# Altium PCB USB-HUB-H.pcbdoc (part 1 of 2)
Units mil, origin at the board's own origin, x right, y up, seen from the top; angles counter-clockwise.
Board outline 2972.16 x 4462.97 mil, 2 copper layers (Top Layer, Bottom Layer); 133 components, 134 nets, 513 pads, 306 vias.
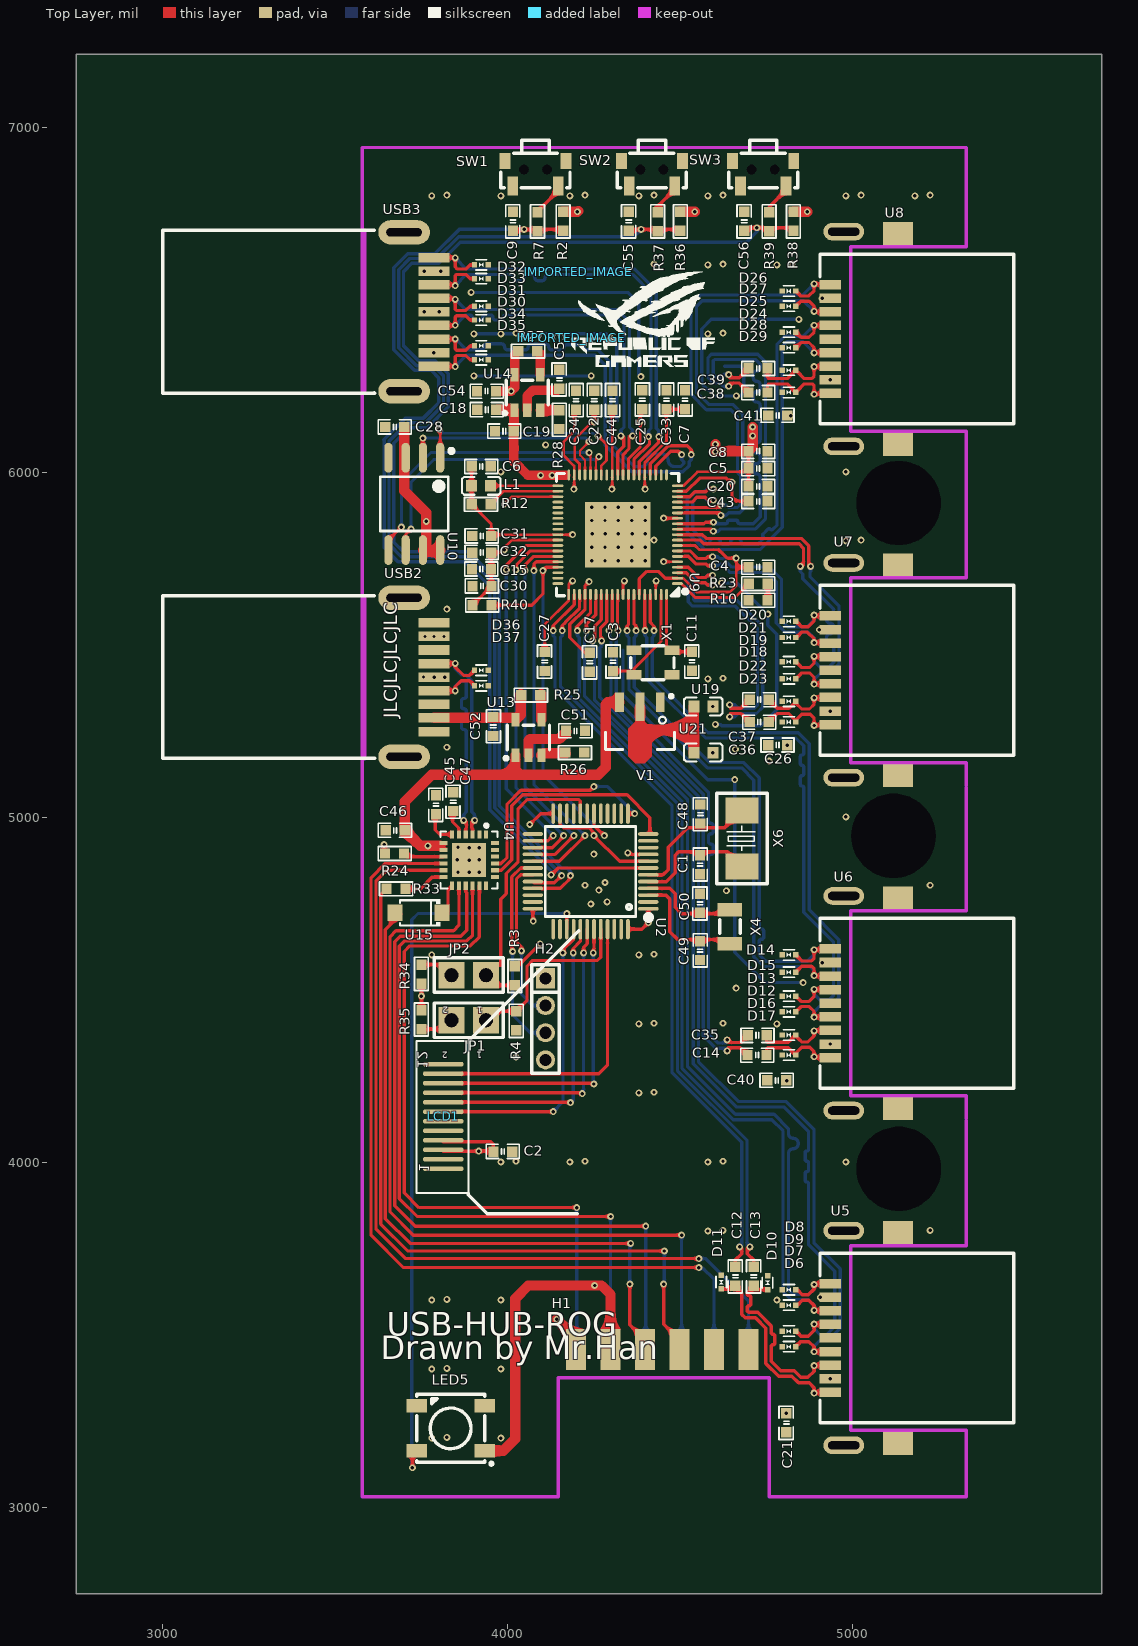
[diagram p0: Top Layer view]
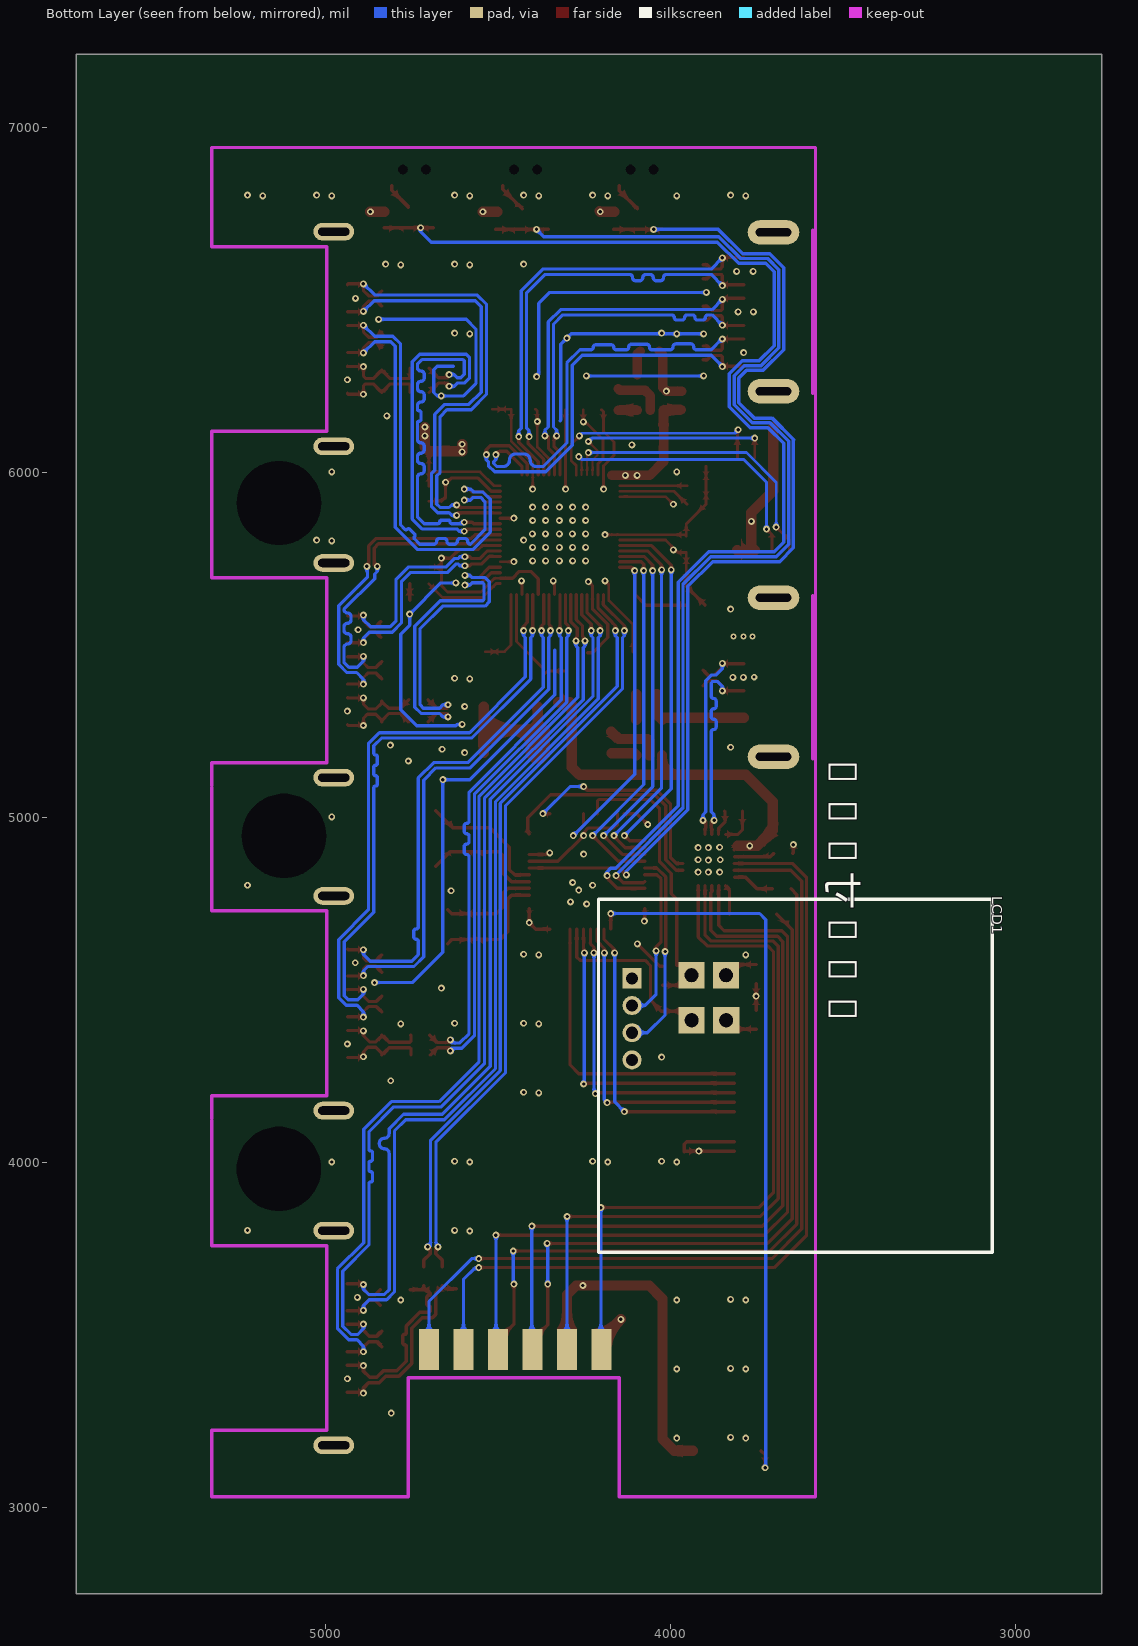
[diagram p1: Bottom Layer view, seen from below]

## Layer stack, top to bottom
Top Layer: signal copper (thickness not stored)
Dielectric: dielectric 12.6, FR-4, Dk 4.8
Bottom Layer: signal copper (thickness not stored)

## Board outline
5722.16,2750 2750,2750 2750,7212.97 5722.16,7212.97
cut-out: 5241.38,4947 ccw(c5119.33,4947) 4997.28,4947 ccw(c5119.33,4947)
cut-out: 5256.38,3982 ccw(c5134.33,3982) 5012.28,3982 ccw(c5134.33,3982)
cut-out: 5256.14,5912 ccw(c5134.09,5912) 5012.05,5912 ccw(c5134.09,5912)

## Components (designator, comment, footprint, x,y, rotation, side; value= is the part's Value field where it differs from the comment)
C1 "20p" C0603-S 4558.56,4836 r90 top
C2 "0.1u" C0603-S 4014.76,4032 r180 top
C3 "22pF" C0603-S 4306.17,5424.56 r90 top
C4 "4.7uF" C0603-S 4699.09,5726 r0 top
C5 "4.7uF" C0603-S 4699.09,6012 r0 top
C6 "4.7uF" C0603-S 3896.47,6018 r0 top
C7 "4.7uF" C0603-S 4515.09,6183.63 r90 top
C8 "4.7uF" C0603-S 4699.09,6062 r0 top
C9 "10u" C0603-S 4016.37,6755.8 r270 top
C11 "22pF" C0603-S 4535.09,5480.56 r270 top
C12 "0.1uF" C0603-S 4660.87,3698 r270 top
C13 "0.1uF" C0603-S 4714.09,3698 r270 top
C14 "0.1uF" C0603-S 4696.09,4311.87 r0 top
C15 "1uF" C0603-S 3952.47,5720 r180 top
C17 "0.1uF" C0603-S 4238.76,5478 r270 top
C18 "47uF/16V" C0603-S 3968.16,6182 r180 top
C19 "47uF/16V" C0603-S 4019.09,6119.5 r180 top
C20 "47uF/16V" C0603-S 4699.09,5960 r0 top
C21 "47uF/16V" C0603-S 4808.57,3274 r270 top
C22 "0.1uF" C0603-S 4251.91,6182 r90 top
C25 "0.1uF" C0603-S 4391.09,6183.63 r90 top
C26 "0.1uF" C0603-S 4811.09,5210 r180 top
C27 "0.1uF" C0603-S 4108.23,5480 r270 top
C28 "0.1uF" C0603-S 3701.64,6132 r180 top
C30 "0.1uF" C0603-S 3954.16,5671 r180 top
C31 "0.1uF" C0603-S 3953.51,5816 r180 top
C32 "0.1uF" C0603-S 3953.51,5768 r180 top
C33 "0.1uF" C0603-S 4461.09,6183.63 r90 top
C34 "0.1uF" C0603-S 4199.19,6182 r90 top
C35 "0.1uF" C0603-S 4697.09,4369.5 r0 top
C36 "0.1uF" C0603-S 4702.22,5277 r0 top
C37 "0.1uF" C0603-S 4702.22,5342 r0 top
C38 "0.1uF" C0603-S 4699.09,6232 r0 top
C39 "0.1uF" C0603-S 4699.09,6302 r0 top
C40 "0.1uF" C0603-S 4808.57,4238.46 r180 top
C41 "0.1uF" C0603-S 4811.09,6165.5 r180 top
C43 "0.1uF" C0603-S 4699.09,5916.5 r0 top
C44 "0.1uF" C0603-S 4304.62,6182 r90 top
C45 "CAP_0603" C0603-S 3793.09,5064.95 r270 top
C46 "CAP_0603" C0603-S 3702.24,4963 r180 top
C47 "CAP_0603" C0603-S 3843.17,5074 r270 top
C48 "20p" C0603-S 4559.56,5037.94 r270 top
C49 "20p" C0603-S 4558.56,4587.15 r90 top
C50 "20p" C0603-S 4558.56,4779.15 r270 top
C51 "CAP_0603" C0603-S 4225.18,5251.27 r180 top
C52 "CAP_0603" C0603-S 3959.43,5236.71 r90 top
C53 "CAP_0603" C0603-S 4150.75,6297.67 r270 top
C54 "CAP_0603" C0603-S 3912.16,6236 r0 top
C55 "10u" C0603-S 4352.09,6755.8 r270 top
C56 "10u" C0603-S 4686.53,6755.8 r270 top
D6 "ESD9B3.3ST5G" SOD-923_L0.8-W0.6-LS1.0-BI-1 4816.12,3467 r0 top
D7 "ESD9B3.3ST5G" SOD-923_L0.8-W0.6-LS1.0-BI-1 4816.12,3512 r0 top
D8 "ESD9B3.3ST5G" SOD-923_L0.8-W0.6-LS1.0-BI-1 4816.12,3631.76 r0 top
D9 "ESD9B3.3ST5G" SOD-923_L0.8-W0.6-LS1.0-BI-1 4816.12,3587 r0 top
D10 "ESD9B3.3ST5G" SOD-923_L0.8-W0.6-LS1.0-BI-1 4754.09,3652 r270 top
D11 "ESD9B3.3ST5G" SOD-923_L0.8-W0.6-LS1.0-BI-1 4619.87,3654 r270 top
D12 "ESD9B3.3ST5G" SOD-923_L0.8-W0.6-LS1.0-BI-1 4816.12,4437 r0 top
D13 "ESD9B3.3ST5G" SOD-923_L0.8-W0.6-LS1.0-BI-1 4816.12,4482.69 r0 top
D14 "ESD9B3.3ST5G" SOD-923_L0.8-W0.6-LS1.0-BI-1 4816.12,4602 r0 top
D15 "ESD9B3.3ST5G" SOD-923_L0.8-W0.6-LS1.0-BI-1 4816.12,4552 r0 top
D16 "ESD9B3.3ST5G" SOD-923_L0.8-W0.6-LS1.0-BI-1 4816.12,4370 r0 top
D17 "ESD9B3.3ST5G" SOD-923_L0.8-W0.6-LS1.0-BI-1 4816.12,4312 r0 top
D18 "ESD9B3.3ST5G" SOD-923_L0.8-W0.6-LS1.0-BI-1 4816.12,5402 r0 top
D19 "ESD9B3.3ST5G" SOD-923_L0.8-W0.6-LS1.0-BI-1 4816.12,5452 r0 top
D20 "ESD9B3.3ST5G" SOD-923_L0.8-W0.6-LS1.0-BI-1 4816.12,5568.48 r0 top
D21 "ESD9B3.3ST5G" SOD-923_L0.8-W0.6-LS1.0-BI-1 4816.12,5522 r0 top
D22 "ESD9B3.3ST5G" SOD-923_L0.8-W0.6-LS1.0-BI-1 4816.12,5337 r0 top
D23 "ESD9B3.3ST5G" SOD-923_L0.8-W0.6-LS1.0-BI-1 4816.12,5277 r0 top
D24 "ESD9B3.3ST5G" SOD-923_L0.8-W0.6-LS1.0-BI-1 4816.12,6362 r0 top
D25 "ESD9B3.3ST5G" SOD-923_L0.8-W0.6-LS1.0-BI-1 4816.12,6407 r0 top
D26 "ESD9B3.3ST5G" SOD-923_L0.8-W0.6-LS1.0-BI-1 4816.12,6526.11 r0 top
D27 "ESD9B3.3ST5G" SOD-923_L0.8-W0.6-LS1.0-BI-1 4816.12,6482.31 r0 top
D28 "ESD9B3.3ST5G" SOD-923_L0.8-W0.6-LS1.0-BI-1 4816.12,6297 r0 top
D29 "ESD9B3.3ST5G" SOD-923_L0.8-W0.6-LS1.0-BI-1 4816.12,6232.11 r0 top
D30 "ESD9B3.3ST5G" SOD-923_L0.8-W0.6-LS1.0-BI-1 3924.47,6442 r180 top
D31 "ESD9B3.3ST5G" SOD-923_L0.8-W0.6-LS1.0-BI-1 3924.47,6482 r180 top
D32 "ESD9B3.3ST5G" SOD-923_L0.8-W0.6-LS1.0-BI-1 3924.47,6602 r180 top
D33 "ESD9B3.3ST5G" SOD-923_L0.8-W0.6-LS1.0-BI-1 3924.47,6562 r180 top
D34 "ESD9B3.3ST5G" SOD-923_L0.8-W0.6-LS1.0-BI-1 3924.47,6367 r180 top
D35 "ESD9B3.3ST5G" SOD-923_L0.8-W0.6-LS1.0-BI-1 3924.47,6327 r180 top
D36 "ESD9B3.3ST5G" SOD-923_L0.8-W0.6-LS1.0-BI-1 3924.47,5427 r180 top
D37 "ESD9B3.3ST5G" SOD-923_L0.8-W0.6-LS1.0-BI-1 3924.47,5382 r0 top
H1 "HDR-M_2.54_2x6" 2.54-2*12pin-SMD 4444.09,3458.54 r0 top
H2 "PZ200V-11-04P" HDR-TH_4P-P2.00-V-M 4110.76,4416.02 r270 top
IMPORTED_IMAGE "IMPORTED_IMAGE" IMPORTED_IMAGE 4205.09,6582 r0 top
IMPORTED_IMAGE "IMPORTED_IMAGE" IMPORTED_IMAGE 4185.09,6390 r0 top
JP1 "跳线" JUMPER2 3888.03,4412.79 r0 top
JP2 "跳线" JUMPER2 3888.26,4543.33 r0 top
L1 "10uH Idc&gt;500mA" L0603 3924.2,5962 r180 top
LCD1 "中景园1.3寸IPS屏" 中景园1.3寸IPS屏-原版 3637.09,4252 r270 bottom
LED5 "WS2812B-B/W" LED-SMD_4P-L5.0-W5.0-BL_TC5050RGB 3835.67,3230 r180 top
R2 "10k" R0603-S 4161.69,6700.8 r90 top
R3 "10k" R0603-S 4021.92,4514 r90 top
R4 "10k" R0603-S 4025.93,4384 r90 top
R7 "300R" R0603-S 4087.43,6754.8 r270 top
R10 "5.1K" R0603-S 4754.09,5630 r180 top
R12 "0Ω/DNP" R0603-S 3896.76,5908 r0 top
R23 "1K" R0603-S 4700.09,5678 r0 top
R24 "10K" R0603-S 3700.64,4896 r180 top
R25 "Res_0603" R0603-S 4095.43,5355 r180 top
R26 "Res_0603" R0603-S 4223.09,5188.51 r180 top
R27 "Res_0603" R0603-S 4087.09,6352 r180 top
R28 "Res_0603" R0603-S 4150.75,6126 r90 top
R33 "Res_0603" R0603-S 3704.77,4793.65 r180 top
R34 "10k" R0603-S 3751.09,4574 r270 top
R35 "10k" R0603-S 3751.09,4442 r270 top
R36 "10k" R0603-S 4501.59,6700.8 r90 top
R37 "300R" R0603-S 4435.6,6754.8 r270 top
R38 "10k" R0603-S 4829.3,6700.8 r90 top
R39 "300R" R0603-S 4758.64,6754.8 r270 top
R40 "10K" R0603-S 3954.16,5615.65 r180 top
SW1 "GT-TC018B-H0375-L1" SW-SMD_L4.7-W3.5-P3.35-EH 4081.56,6867 r0 top
SW2 "GT-TC018B-H0375-L1" SW-SMD_L4.7-W3.5-P3.35-EH 4419.09,6867 r0 top
SW3 "GT-TC018B-H0375-L1" SW-SMD_L4.7-W3.5-P3.35-EH 4741.43,6867 r0 top
U2 "STM32F103C6T6ATR" LQFP-48_L7.0-W7.0-P0.50-LS9.0-BL 4241.27,4844.15 r90 top
U4 "CH342F" VQFN-24_L4.0-W4.0-P0.50-TL-EP2.4 3889.31,4877 r270 top
U5 "A32-099A-111" USB-SMD_A32-099A-111 5034.09,3492 r90 top
U6 "A32-099A-111" USB-SMD_A32-099A-111 5034.09,4462 r90 top
U7 "A32-099A-111" USB-SMD_A32-099A-111 5034.09,5427 r90 top
U8 "A32-099A-111" USB-SMD_A32-099A-111 5034.09,6387 r90 top
U9 "VL813(A1)" "VL813 QFN-76 02" 4319.68,5820 r90 top
U10 "W25Q16JVSIQ" W25Q16 3805.42,6038 r180 top
U13 "MT9700" SOT-23-5_L3.0-W1.7-P0.95-LS2.8-BR 4061.22,5232 r270 top
U14 "MT9700" SOT-23-5_L3.0-W1.7-P0.95-LS2.8-BR 4057.91,6232 r270 top
U15 "BAV21W_C2903907" SOD-123_L2.7-W1.6-LS3.8-RD 3742.82,4724 r180 top
U19 "BLM18PG121SN1D" L0603 4568.16,5322 r0 top
U21 "BLM18PG121SN1D" L0603 4568.16,5188.14 r0 top
USB2 "U237-091N-4BLVS10-1" USB3.0-A-SMD_U237-091N-4BLVS10-1 3744.09,5407 r270 top
USB3 "U237-091N-4BLVS10-1" USB3.0-A-SMD_U237-091N-4BLVS10-1 3744.09,6465.71 r270 top
V1 "AMS1117" SOT89_N 4384.34,5257.43 r90 top
X1 "XTAL_3225_25M" SMD-4_3225-ACM3225 4422.09,5449.06 r180 top
X4 "Q13FC1350000400" FC-135R_L3.2-W1.5 4645.1,4684.15 r270 top
X6 "XC53G2-8.000-F12NJHP" CRYSTAL-SMD_L5.0-W3.2 4680.04,4939.47 r270 top

## Footprints (in the part's own frame and the unit in brackets; to place one, negate y for a bottom-side part, rotate by r counter-clockwise, add the part's x,y. Pads: shape width x height; smd on the part's side, far side on the other; paste and mask are expansions set on the pad)
2.54-2*12pin-SMD [mm]
  rect 1.5x3 smd: 1(-6.223,0) 3(-3.683,0) 5(-1.143,0) 7(1.397,0) 9(3.937,0) 11(6.477,0)
  rect 1.5x3 smd far side: 2(-6.223,0) 4(-3.683,0) 6(-1.143,0) 8(1.397,0) 10(3.937,0) 12(6.477,0)
C0603-S [mil]
  rect 30x30 smd: 1(0,0) 2(55,0)
  silkscreen extent -20,-21 76,20
CRYSTAL-SMD_L5.0-W3.2 [mm]
  rect 1.9x2.4 smd: 1(-2.05,0) 2(2.05,0)
  silkscreen extent -3.32,-1.85 3.33,1.85
FC-135R_L3.2-W1.5 [mm]
  rect 1x1.8 smd: 1(-1.25,0) 2(1.25,0)
  silkscreen extent -0.51,-0.76 0.51,0.76
HDR-TH_4P-P2.00-V-M [mm]
  rect 1.524x1.4 hole 0.9: 1(-3,0)
  round 1.4 hole 0.9: 2(-1,0) 3(1,0) 4(3,0)
  silkscreen extent -4,-1 4,1.02
IMPORTED_IMAGE [mil]
  silkscreen extent 0,-189 366,0
JUMPER2 [mil]
  rect 76x76 hole 39.4 slot 39.6 at 90 deg: 1(50,0) 2(-50,0)
  silkscreen extent -100,-50 100,50
L0603 [mm]
  rect 0.8x0.864 smd: 1(-0.7,0) 2(0.7,0)
  silkscreen extent -1.42,-0.65 1.41,0.67
LED-SMD_4P-L5.0-W5.0-BL_TC5050RGB [mm]
  rect 1.5x1 smd: 1(-2.5,1.65) 2(-2.5,-1.65) 3(2.5,-1.65) 4(2.5,1.65)
  silkscreen extent -3.1,-2.5 2.5,2.7
LQFP-48_L7.0-W7.0-P0.50-LS9.0-BL [mm]
  oval 0.27x1.5 smd: 1(-2.75,-4.25) 2(-2.25,-4.25) 3(-1.75,-4.25) 4(-1.25,-4.25) 5(-0.75,-4.25) 6(-0.25,-4.25) 7(0.25,-4.25) 8(0.75,-4.25) 9(1.25,-4.25) 10(1.75,-4.25) 11(2.25,-4.25) 12(2.75,-4.25) 25(2.75,4.25) 26(2.25,4.25) 27(1.75,4.25) 28(1.25,4.25) 29(0.75,4.25) 30(0.25,4.25) 31(-0.25,4.25) 32(-0.75,4.25) 33(-1.25,4.25) 34(-1.75,4.25) 35(-2.25,4.25) 36(-2.75,4.25)
  oval 1.5x0.27 smd: 13(4.25,-2.75) 14(4.25,-2.25) 15(4.25,-1.75) 16(4.25,-1.25) 17(4.25,-0.75) 18(4.25,-0.25) 19(4.25,0.25) 20(4.25,0.75) 21(4.25,1.25) 22(4.25,1.75) 23(4.25,2.25) 24(4.25,2.75) 37(-4.25,2.75) 38(-4.25,2.25) 39(-4.25,1.75) 40(-4.25,1.25) 41(-4.25,0.75) 42(-4.25,0.25) 43(-4.25,-0.25) 44(-4.25,-0.75) 45(-4.25,-1.25) 46(-4.25,-1.75) 47(-4.25,-2.25) 48(-4.25,-2.75)
  silkscreen extent -3.59,-4.46 3.3,3.34
R0603-S [mil]
  rect 30x30 smd: 1(0,0) 2(55,0)
  silkscreen extent -21,-20 75,20
SMD-4_3225-ACM3225 [mm]
  rect 1.1x0.7 smd: 1(-1.4,-0.9) 2(-1.4,0.9) 3(1.4,0.9) 4(1.4,-0.9)
  silkscreen extent -1.55,-1.24 1.63,1.24
SOD-123_L2.7-W1.6-LS3.8-RD [mm]
  rect 1.1x1.2 smd: 1(-1.735,0) 2(1.735,0)
  silkscreen extent -1.6,-1 1.38,1
SOD-923_L0.8-W0.6-LS1.0-BI-1 [mm]
  rect 0.4x0.4 smd: 1(-0.5,0) 2(0.5,0)
  silkscreen extent -0.41,-0.38 0.41,0.38
SOT89_N [mm]
  rect 1.4x0.65 smd: 1(1.952,-1.5) 3(1.952,1.5)
  rect 2.1x0.65 smd: 2(1.626,0)
  Top Layer region: -0.002,-0.878 0.512,-0.364 0.512,0.364 -0.002,0.878 -2.03,0.878 -2.544,0.364 -2.544,-0.364 -2.03,-0.878
  silkscreen extent -1.52,-2.54 2.52,2.54
SOT-23-5_L3.0-W1.7-P0.95-LS2.8-BR [mm]
  rect 1x0.6 smd: 1(1.3,-0.95) 2(1.3,0) 3(1.3,0.95) 4(-1.3,0.95) 5(-1.3,-0.95)
  silkscreen extent -0.9,-1.78 1.65,1.55
SW-SMD_L4.7-W3.5-P3.35-EH [mm]
  rect 0.8x1.4 smd: 1(-1.675,-0.917) 2(1.675,-0.917)
  rect 0.8x1.2 smd: 3(-2.25,0.917) 4(2.25,0.917)
  Multi-Layer board cut-out: -0.5,0.282 -0.535,0.434 -0.632,0.556 -0.772,0.624 -0.928,0.624 -1.068,0.556 -1.165,0.434 -1.2,0.282 -1.2,0.282 -1.165,0.131 -1.068,0.009 -0.928,-0.059 -0.772,-0.059 -0.632,0.009 -0.535,0.131 -0.5,0.282
  Multi-Layer board cut-out: 1.2,0.282 1.165,0.434 1.068,0.556 0.928,0.624 0.772,0.624 0.632,0.556 0.535,0.434 0.5,0.282 0.5,0.282 0.535,0.131 0.632,0.009 0.772,-0.059 0.928,-0.059 1.068,0.009 1.165,0.131 1.2,0.282
  silkscreen extent -2.54,-1.07 2.54,2.43
USB3.0-A-SMD_U237-091N-4BLVS10-1 [mm]
  rect 0.7x2.3 smd: 1(3,1.1) 2(1,1.1) 3(-1,1.1) 4(-3,1.1) 5(-4,1.1) 6(-2,1.1) 7(0,1.1) 8(2,1.1) 9(4,1.1)
  oval 1.8x3.8 hole 0.6 slot 2.6 at 90 deg: 10(-5.85,-1.1) 10(5.85,-1.1)
  Board Outline Layer lines w0.254: 6,-4 -6,-4 6,-4
  silkscreen extent -6,-18.85 5.98,-3.25
USB-SMD_A32-099A-111 [mm]
  rect 0.7x1.6 smd: 1(-3,2.5) 2(-1,2.5) 3(1,2.5) 4(3,2.5) 5(4,2.5) 6(2,2.5) 7(0,2.5) 8(-2,2.5) 9(-4,2.5)
  oval 1.3x3 hole 0.6 slot 2.3 at 90 deg: 10(-7.9,1.5) 11(7.9,1.5)
  rect 1.7x2.2 smd: 12(-7.75,-2.5) 13(7.75,-2.5)
  Board Outline Layer lines w0.254: -6.8,0.98 -6.8,-7.5 ; -6.8,0.98 6.8,0.98 ; -6.8,0.98 -6.8,-7.5 ; -6.8,0.98 6.8,0.98 ; 6.8,0.98 6.8,-7.5 ; 6.8,0.98 6.8,-7.5 ; -6.8,-7.5 -8.52,-7.5 -6.8,-7.5 ; -6.8,-7.5 -6.8,-7.5 ; -6.8,-7.5 -6.8,-7.5 ; -6.8,-7.5 -6.8,-7.5 ; -6.8,-7.5 -6.8,-7.5 ; 6.8,-7.5 8.52,-7.5 6.8,-7.5
  silkscreen extent -6.25,-11 6.25,3.25
"VL813 QFN-76 02" [mil]
  oval 7.9x31.5 smd: 1(-141.7,-173.2) 2(-126,-173.2) 3(-110.2,-173.2) 4(-94.5,-173.2) 5(-78.7,-173.2) 6(-63,-173.2) 7(-47.2,-173.2) 8(-31.5,-173.2) 9(-15.7,-173.2) 10(0,-173.2) 11(15.8,-173.2) 12(31.5,-173.2) 13(47.2,-173.2) 14(63,-173.2) 15(78.7,-173.2) 16(94.5,-173.2) 17(110.2,-173.2) 18(126,-173.2) 19(141.7,-173.2) 39(141.7,173.2) 40(126,173.2) 41(110.2,173.2) 42(94.5,173.2) 43(78.7,173.2) 44(63,173.2) 45(47.2,173.2) 46(31.5,173.2) 47(15.8,173.2) 48(0,173.2) 49(-15.7,173.2) 50(-31.5,173.2) 51(-47.2,173.2) 52(-63,173.2) 53(-78.7,173.2) 54(-94.5,173.2) 55(-110.2,173.2) 56(-126,173.2) 57(-141.7,173.2)
  oval 31.5x7.9 smd: 20(173.2,-141.7) 21(173.2,-126) 22(173.2,-110.2) 23(173.2,-94.5) 24(173.2,-78.7) 25(173.2,-63) 26(173.2,-47.2) 27(173.2,-31.5) 28(173.2,-15.7) 29(173.2,0) 30(173.2,15.8) 31(173.2,31.5) 32(173.2,47.3) 33(173.2,63) 34(173.2,78.7) 35(173.2,94.5) 36(173.2,110.2) 37(173.2,126) 38(173.2,141.7) 58(-173.2,141.7) 59(-173.2,126) 60(-173.2,110.2) 61(-173.2,94.5) 62(-173.2,78.7) 63(-173.2,63) 64(-173.2,47.3) 65(-173.2,31.5) 66(-173.2,15.8) 67(-173.2,0) 68(-173.2,-15.7) 69(-173.2,-31.5) 70(-173.2,-47.2) 71(-173.2,-63) 72(-173.2,-78.7) 73(-173.2,-94.5) 74(-173.2,-110.2) 75(-173.2,-126) 76(-173.2,-141.7)
  rect 190x190 smd: 77(0,0)
  silkscreen extent -177,-202 177,177
VQFN-24_L4.0-W4.0-P0.50-TL-EP2.4 [mm]
  rect 0.6x0.3 smd: 1(-1.892,1.25) 2(-1.892,0.75) 3(-1.892,0.25) 4(-1.892,-0.25) 5(-1.892,-0.75) 6(-1.892,-1.25) 13(1.892,-1.25) 14(1.892,-0.75) 15(1.892,-0.25) 16(1.892,0.25) 17(1.892,0.75) 18(1.892,1.25)
  rect 0.3x0.6 smd: 7(-1.25,-1.898) 8(-0.75,-1.898) 9(-0.25,-1.898) 10(0.25,-1.898) 11(0.75,-1.898) 12(1.25,-1.898) 19(1.25,1.898) 20(0.75,1.898) 21(0.25,1.898) 22(-0.25,1.898) 23(-0.75,1.898) 24(-1.25,1.898)
  rect 2.5x2.5 smd: 25(-0.001,-0.001)
  silkscreen extent -2.66,-2.1 2.1,2.1
W25Q16 [mm]
  oval 0.6x2.2 smd: 1(0,-0.127) 2(1.27,-0.127) 3(2.54,-0.127) 4(3.81,-0.127) 5(3.81,6.673) 6(2.54,6.673) 7(1.27,6.673) 8(0,6.673)
  silkscreen extent -0.97,-0.78 4.4,5.27
中景园1.3寸IPS屏-原版 [mm]
  oval 0.35x3 smd far side: 1(6.85,-4.5) 2(6.15,-4.5) 3(5.45,-4.5) 4(4.75,-4.5) 5(4.05,-4.5) 6(3.35,-4.5) 7(2.65,-4.5) 8(1.95,-4.5) 9(1.25,-4.5) 10(0.55,-4.5) 11(-0.15,-4.5) 12(-0.85,-4.5)
  silkscreen extent -13,-14.5 13,14.5

## Via types
v1: diameter 20, hole 10, Top Layer to Bottom Layer, 300 vias
v2: diameter 18, hole 9, Top Layer to Bottom Layer, 5 vias
v3: diameter 20, hole 9, Top Layer to Bottom Layer, 1 vias

## Nets (pads, with @x,y where several pads share a name; then routed paths per layer and width w, separated by ;. In a path a pad name is that pad's centre, name@x,y a point inside that pad or via, vN(x,y) a via of type N, cw(c..) or ccw(c..) an arc to the next point about the centre after c; other vN are vias at no path point)
1V2: C6.1 C7.1 C17.1 C27.1 C31.1 C33.1 C34.1 C44.1 L1.2 R12.1 U9.5 U9.13 U9.24 U9.30 U9.37 U9.48 U9.58 U9.61 U9.68 U9.74 | length 1924.5
  Top Layer w7.87: U9.48@4146.48,5820 v1(4189.09,5820) ; v1(4193.09,5952) 4193.68,5952.59 U9.37@4193.68,5993.2 ; v1(4303.09,5952) 4303.88,5952.79 U9.30@4303.88,5993.2 ; U9.68@4335.38,5646.8 4335.38,5682.29 v1(4339.09,5686) ; U9.24@4398.38,5993.2 4398.38,5952.71 v1(4399.09,5952) ; U9.74@4429.88,5646.8 4429.88,5684.79 v1(4431.09,5686) ; v1(4453.09,5742) 4453.79,5741.3 U9.5@4492.88,5741.3
  Top Layer w8: C6.1@3896.47,6018 3896.47,5908.29 R12.1@3896.76,5908 3953.51,5851.25 C31.1@3953.51,5816 3957.51,5820 U9.48@4146.48,5820 ; C27.1@4108.23,5480 4108.23,5559.14 4177.98,5628.89 U9.58@4177.98,5646.8 4177.98,5674.89 v1(4189.09,5686) ; U9.37@4193.68,5993.2 4193.68,6019.41 4163.09,6050 4163.09,6088.34 4193.68,6118.93 4193.68,6176.49 C34.1@4199.19,6182 ; U9.61@4225.18,5646.8 4225.18,5672.09 v1(4237.09,5684) ; U9.30@4303.88,5993.2 4303.88,6181.26 C44.1@4304.62,6182 ; U9.24@4398.38,5993.2 4398.38,6028.32 4461.09,6091.03 C33.1@4461.09,6183.63 C7.1@4515.09,6183.63
  Top Layer w9.5: U9.61@4225.18,5646.8 4225.18,5604.09 4181.09,5560 4181.09,5522 4225.09,5478 C17.1@4238.76,5478 ; v1(4453.09,5868) 4453.89,5867.2 U9.13@4492.88,5867.2
3.3V: U19.1 U21.1 V1.2 | length 400.8
  Top Layer w30: 4384.34,5217.43 4384.34,5237.91 ; V1.2@4384.34,5321.43 4384.34,5237.91 ; U21.1@4540.6,5188.14 4540.6,5254 ; U19.1@4540.6,5322 4540.6,5254 ; 4384.34,5237.91 4400.44,5254 4540.6,5254
3V3: C4.1 C15.1 C22.1 C25.1 C28.1 C30.1 C32.1 C43.1 R2.2 R36.2 R38.2 R40.2 U9.2 U9.8 U9.18 U9.27 U9.36 U9.41 U9.49 U9.71 U10.3 U10.7 U10.8 U19.2 | length 2476.6
  Top Layer w7.87: v1(3991.09,5908) 4013.29,5930.2 U9.41@4146.48,5930.2
  Top Layer w8: C30.1@3954.16,5671 3953.51,5671.65 C32.1@3953.51,5768 3977.09,5768 4013.39,5804.3 U9.49@4146.48,5804.3 ; U9.36@4209.48,5993.2 4209.48,6025.61 4195.09,6040 4195.09,6096 4245.91,6146.81 v1(4251.91,6146.81) C22.1@4251.91,6182 ; U9.27@4351.18,5993.2 4351.18,6040.09 4385.1,6074.01 v1(4385.09,6148) 4385.1,6177.64 C25.1@4391.09,6183.63 ; U9.2@4492.88,5694 4508.71,5694 4548.71,5654 4645.09,5654 4663.09,5672 4663.09,5726 ; 4544.59,5788.5 4557.09,5776 4613.09,5776 ; v1(4663.09,5752) 4663.09,5726 ; 4663.09,5916.5 C43.1@4699.09,5916.5 ; C4.1@4699.09,5726 4663.09,5726
  Top Layer w9.5: R40.2@3899.16,5615.65 3954.16,5670.65 C30.1@3954.16,5671 ; U9.71@4382.68,5646.8 4382.68,5691.59 4404.59,5713.5 4437.59,5713.5 4457.09,5694 U9.2@4492.88,5694 ; U9.8@4492.88,5788.5 4544.59,5788.5 ; 4613.09,5776 4637.09,5752 v1(4663.09,5752)
  Top Layer w9.53: U9.18@4492.88,5946 4519.09,5946 4557.09,5984 4635.09,5984 v1@4651.09,5968 ; v1(4651.09,5972) v1@4651.09,5968 ; 4663.09,5916.5 4651.09,5928.5 v1@4651.09,5968
  Top Layer w30: C28.1@3701.64,6132 3701.64,5947.45 3765.09,5884 v1(3765.09,5858.69) 3765.09,5784.95 U10.7@3755.42,5775.28 ; U10.7@3765.09,5770 3800.14,5770 U10.8@3805.42,5775.28 ; R2.2@4161.69,6755.8 v1(4202.9,6755.8) v1@4205.09,6758 ; R36.2@4501.59,6755.8 v1(4543.09,6755.8) ; R38.2@4829.3,6755.8 v1(4869.09,6755.8)
  other v1: 4595.72,5322 3991.09,5776
$1N3467: LED5.2
$1N7330: L1.1 U9.39 | length 194.8
  Top Layer w8: L1.1@3951.76,5962 3952.06,5961.7 U9.39@4146.48,5961.7
$1N7335: R12.2 U9.40 | length 210.5
  Top Layer w8: R12.2@3951.76,5908 3989.76,5946 U9.40@4146.48,5946
$1N7370: C3.1 U9.75 X1.3 | length 331.1
  Top Layer w8: C3.1@4306.17,5424.56 4356.04,5424.56 X1.3@4366.98,5413.61 4366.98,5431.39 4445.68,5510.1 U9.75@4445.68,5646.8
$1N7371: C11.1 U9.76 X1.1 | length 228.4
  Top Layer w8: U9.76@4461.38,5646.8 4461.38,5500.32 X1.1@4477.21,5484.49 4481.15,5480.56 C11.1@4535.09,5480.56
$1N7419: R23.1 U9.1 | length 240.5
  Top Layer w8: U9.1@4492.88,5678.3 4504.2,5678.3 4544.5,5638 4660.09,5638 R23.1@4700.09,5678
$1N7420: R10.1 R23.2 | length 48.4
  Top Layer w9.5: R10.1@4754.09,5630 4755.09,5631 R23.2@4755.09,5678
$1N10343: C45.2 U4.6 | length 109.1
  Top Layer w9: C45.2@3791.09,5019 3791.09,4964.22 3803.84,4951.47 U4.6@3840.1,4951.47
$1N13634: U2.2
$1N13637: U2.10
$1N13638: U2.11
$1N13640: U2.19
$1N13642: U2.21
$1N13643: U2.22
$1N13650: U2.25
$1N13660: U2.34
$1N13663: U2.37
$1N13694: U2.38
$1N13699: U2.46
$1N15916: R7.1 SW1.2 | length 88.2
  Top Layer w10: R7.1@4094.99,6764.46 4147.51,6816.99 SW1.2@4147.51,6830.88
$1N16321: C51.2 U13.2 | length 163.1
  Top Layer w30: U13.2@4061.22,5180.81 4061.22,5223.24 4065.98,5228 4149.87,5228 C51.2@4171.14,5249.27
$1N16384: R25.1 U13.4 | length 74
  Top Layer w30: R25.1@4098.2,5357 4098.2,5283.6 U13.4@4098.62,5283.19
$1N16479: R26.2 U13.3 | length 73.3
  Top Layer w30: U13.3@4098.62,5180.81 4104.81,5187 4144,5187 R26.2@4169.34,5187
$1N16702: C53.2 U14.2 | length 143.1
  Top Layer w27.56: U14.2@4057.91,6180.81 4057.91,6222.81 4073.09,6238 4146.08,6238 C53.2@4150.75,6242.67
$1N16705: R27.1 U14.4 | length 72.2
  Top Layer w27.56: R27.1@4087.09,6352 4095.3,6343.79 U14.4@4095.3,6283.19
$1N16707: R28.2 U14.3 | length 55.5
  Top Layer w27.56: U14.3@4095.3,6180.81 4095.49,6181 R28.2@4150.75,6181
$1N18872: H1.5 U15.2 | length 1967.7
  Top Layer w9.5: U15.2@3691.45,4720 3646.59,4675.14 3646.59,3837.5 3718.09,3766 v1(4357.09,3766) ; v1(4355.09,3648) 4355.09,3530 4399.09,3486 H1.5@4399.09,3458.54
  Bottom Layer w9.5: v1(4355.09,3648) 4355.09,3764 v1(4357.09,3766)
$1N18927: H1.7 R33.2 | length 2138.2
  Top Layer w9.5: R33.2@3649.77,4793.65 3633.09,4776.97 3633.09,3822 3711.09,3744 v1(4455.09,3744) ; v1(4453.09,3648) 4453.09,3532 4499.09,3486 H1.7@4499.09,3458.54
  Bottom Layer w9.5: v1(4453.09,3648) 4455.09,3650 v1(4455.09,3744)
$1N27877: JP2.2 R34.1 | length 99.9
  Top Layer w9.5: R34.1@3751.09,4574 3807.59,4574 JP2.2@3838.26,4543.33
$1N27901: JP1.2 R35.2 | length 97.6
  Top Layer w9.5: R35.2@3751.09,4387 3812.24,4387 JP1.2@3838.03,4412.79
$1N36326: R37.1 SW2.2 | length 89.9
  Top Layer w10: R37.1@4428.44,6764.46 4485.04,6821.07 SW2.2@4485.04,6830.88
$1N36448: R39.1 SW3.2 | length 81.6
  Top Layer w10: R39.1@4758.64,6769.46 4807.38,6818.2 SW3.2@4807.38,6830.88
+5V: C46.1 H1.1 U4.7 U4.8 U13.1 V1.3 | length 1254.4
  Top Layer w10: 3801.99,4923.43 3812.97,4923.43 3812.97,4908.13 U4.8@3814.58,4906.53
  Top Layer w30: 3804.57,4918 v1(3769.57,4918) 3747.24,4918 C46.1@3702.24,4963 3702.24,4987.14 3703.09,4988 3703.09,5046 3781.09,5124 4037.82,5124 ; U13.1@4023.82,5180.81 4023.82,5138 4037.82,5124 ; v1(4143.09,3546) 4199.09,3490 H1.1@4199.09,3458.54 ; V1.3@4325.28,5334.3 4291.4,5334.3 4285.09,5328 4285.09,5146 4263.09,5124 4037.82,5124
CS: LCD1.8 U2.41 | length 884
  Top Layer w9.3: LCD1.8@3814.26,4175.23 4181.86,4175.23 v1(4183.09,4174) ; v1(4191.09,4608) 4191.09,4620.66 4211.74,4641.3 U2.41@4211.74,4676.83
  Bottom Layer w9.3: v1(4183.09,4174) 4191.09,4182 v1(4191.09,4608)
CTS0: U4.18
CTS1: H1.10 U4.10 | length 2513
  Top Layer w9.5: U4.10@3814.58,4867.16 3646.25,4867.16 3605.09,4826 3605.09,3790 3699.09,3696 v1(4555.09,3696)
  Bottom Layer w9.3: v1(4555.09,3696) 4565.09,3696 4599.09,3662 H1.10@4599.09,3458.54
D+: D36.2 U4.3 USB2.3 | length 678.2
  Top Layer w9.3: v2(3849.09,5447) 3849.09,5436 3872.94,5412.15 3889.93,5412.15 D36.2@3904.78,5427
  Top Layer w9.5: U4.3@3899.16,4951.47 3899.16,4968.03 3897.06,4970.13 3897.06,4988.64 3900.42,4992 v1(3905.09,4992)
  Top Layer w10: USB2.3@3787.4,5446.38 3848.47,5446.38 v2(3849.09,5447)
  Bottom Layer w9.5: v2(3849.09,5447) 3849.09,5430.74 3866.33,5413.5 3879.76,5413.5 3896.84,5396.42 3896.84,5017.01 3905.09,5008.76 v1(3905.09,4992)
  other v1: 3849.09,5447
D-: D37.1 U4.4 USB2.2 | length 679.1
  Top Layer w9.3: v1(3849.09,5367) 3849.09,5380 3865.94,5396.85 3889.93,5396.85 D37.1@3904.78,5382
  Top Layer w9.5: v1(3873.09,4992) 3878.2,4992 3881.56,4988.64 3881.56,4970.13 3879.47,4968.03 U4.4@3879.47,4951.47
  Top Layer w10: USB2.2@3787.4,5367.64 3848.46,5367.64 v1(3849.09,5367)
  Bottom Layer w9.5: v1(3849.09,5367) 3849.09,5380.44 3863.28,5394.62 3876.72,5394.62 3881.34,5390 3881.34,5352.39 cw(c3874.22,5352.39) 3874.22,5345.27 ccw(c3874.22,5338.14) 3867.09,5338.14 3867.09,5322.39 ccw(c3874.22,5322.39) 3874.22,5315.27 cw(c3874.22,5308.14) 3881.34,5308.14 3881.34,5292.39 cw(c3874.22,5292.39) 3874.22,5285.27 ccw(c3874.22,5278.14) 3867.09,5278.14 3867.09,5262.39 ccw(c3874.22,5262.39) 3874.22,5255.27 cw(c3874.22,5248.14) 3881.34,5248.14 3881.34,5017.01 3873.09,5008.76 v1(3873.09,4992)
D/C: LCD1.7 U2.40 | length 872.2
  Top Layer w9.3: LCD1.7@3814.26,4147.67 4132.76,4147.67 v1(4133.09,4148) ; v1(4161.09,4608) 4161.09,4616.66 4192.06,4647.62 U2.40@4192.06,4676.83
  Bottom Layer w9.3: v1(4133.09,4148) 4161.09,4176 v1(4161.09,4608)
DCD0: U4.24
DCD1: H1.4 U4.16 | length 2118.9
  Top Layer w9.5: U4.16@3899.16,4802.51 3899.16,4659.15 3882.5,4642.5 3702.4,4642.5 3687.09,4627.2 3687.09,3896 3739.09,3844 v1(4299.09,3844)
  Bottom Layer w9.3: H1.4@4299.09,3458.54 v1(4299.09,3844)
DSR0: U4.22
DSR1: H1.8 U4.14 | length 2332.9
  Top Layer w9.5: U4.14@3859.79,4802.51 3859.79,4687.5 3844.29,4672 3677.09,4672 3660.09,4655 3660.09,3857 3727.09,3790 v1(4505.09,3790)
  Bottom Layer w9.3: H1.8@4499.09,3458.54 4505.09,3464.54 v1(4505.09,3790)
DTR0: U4.23
DTR1: H1.6 U4.15 | length 2228.4
  Top Layer w9.5: U4.15@3879.47,4802.51 3879.47,4785.28 3882.59,4782.23 3882.59,4673.5 3865.09,4656 3689.09,4656 3673.59,4640.5 3673.59,3875.5 3733.09,3816 v1(4401.09,3816)
  Bottom Layer w9.3: H1.6@4399.09,3458.54 4401.09,3460.54 v1(4401.09,3816)
EXTPWRON: U9.47
GND: C1.1 C2.1 C3.2 C4.2 C5.2 C6.2 C7.2 C8.2 C9.1 C11.2 C15.2 C17.2 C18.2 C19.2 C20.2 C21.2 C22.2 C25.2 C26.2 C27.2 C28.2 C30.2 C31.2 C32.2 C33.2 C34.2 C40.2 C41.2 C43.2 C44.2 C45.1 C46.2 C47.1 C48.1 C49.1 C50.1 C51.1 C52.1 C53.1 C54.1 C55.1 C56.1 D6.1 D7.1 D8.1 D9.1 D10.1 D11.1 D12.1 D13.1 D14.1 D15.1 D16.1 D17.1 D18.1 D19.1 D20.1 D21.1 D22.1 D23.1 D24.1 D25.1 D26.1 D27.1 D28.1 D29.1 D30.1 D31.1 D32.1 D33.1 D34.1 D35.1 D36.1 D37.2 H1.9 H1.11 H2.4 LCD1.1 LCD1.2 LCD1.5 LCD1.6 LCD1.12 LED5.3 R3.2 R4.1 R10.2 R26.1 R28.1 SW1.1 SW1.3 SW1.4 SW2.1 SW2.3 SW2.4 SW3.1 SW3.3 SW3.4 U2.8 U2.23 U2.35 U2.47 U4.2 U4.25 U5.4 U5.7 U5.10 U5.11 U5.12 U5.13 U6.4 U6.7 U6.10 U6.11 U6.12 U6.13 U7.4 U7.7 U7.10 U7.11 U7.12 U7.13 U8.4 U8.7 U8.10 U8.11 U8.12 U8.13 U9.20 U9.57 U9.77 U10.4 USB2.4 USB2.7 USB2.10 USB3.4 USB3.7 USB3.10 V1.1 X1.2 X1.4 | length 4809.8
  Top Layer w9.5: R3.2@4021.92,4569 4030.09,4569 v1(4095.09,4634) ; U2.23@4152.69,5011.47 4152.69,4980.35 4163.04,4970 4237.09,4970 4251.09,4956 v1(4251.09,4948) 4325.41,4873.68 U2.8@4408.59,4873.68
  Bottom Layer w9.5: v1(3895.09,6522) 4349.09,6522 4381.09,6490 4381.09,6284 v1(4387.09,6278) ; v1(3903.09,6280) v1(4243.09,6280) v1@4245.09,6278 ; v1(3903.09,6402) v1(3981.09,6402) 4287.09,6402 v1(4299.69,6389.4) 4317.09,6372 4317.09,6152 4319.09,6150 ; 4335.09,5485.75 4335.09,5356 4581.09,5110 v1(4659.09,5110) 4659.09,4610 4747.09,4522 v1(4857.09,4522) ; v1(4603.09,5270) 4617.09,5270 4621.09,5266 4735.09,5266 4781.09,5312 4781.09,5532 4755.09,5558 v1(4755.09,5590) 4665.09,5680 v1(4621.09,5680) ; 4629.09,6308 4675.59,6308 4685.09,6298.5 4685.09,6232 4675.09,6222 v1(4663.61,6222) 4599.09,6222 4563.09,6258 4563.09,6416 4591.09,6444 v1(4845.09,6444)
  other v1: 3781.09,3202 3981.09,3202 3825.09,3204 3781.09,3402 3981.09,3402 3825.09,3404 3781.09,3602 3981.09,3602 4781.09,3602 3825.09,3604 4906.81,3609.48 4581.09,3802 4625.09,3804 5225.09,3804 3981.09,4002 4181.09,4002 4581.09,4002 4981.09,4002 4025.09,4004 4225.09,4004 4625.09,4004 4381.09,4202 4425.09,4204 4025.09,4306 4381.09,4402 4781.09,4402 4425.09,4404 4625.09,4404 4663.09,4506 4912.92,4579.48 3781.09,4602 4381.09,4602 4425.09,4604 4242.26,4749.61 4289.09,4756 4635.09,4788 4265.09,4790 4225.09,4804 5225.09,4804 4283.09,4812 3857.09,4842 3889.31,4841.91 3919.09,4842 3889.28,4877.03 3855.09,4878 3919.09,4878 4251.09,4894 3889.31,4913.28 3919.21,4913.28 3857.09,4914 4981.09,5002 4759.09,5164 4661.09,5198 3825.09,5204 4581.09,5402 4625.09,5404 3788.03,5406.36 3818.52,5406.36 4904.38,5544.48 3825.09,5604 4245.09,5744 4283.09,5744 4321.09,5744 4361.09,5744 4399.09,5744 4245.09,5783 4283.09,5783 4321.09,5783 4361.09,5783 4399.09,5783 4981.09,5802 4425.09,5804 5025.09,5804 4245.5,5822 4283.5,5822 4321.5,5822 4361.5,5822 4399.5,5822 4245.09,5861 4283.09,5861 4321.09,5861 4361.09,5861 4399.09,5861 4245.09,5900 4283.09,5900 4321.09,5900 4361.09,5900 4399.09,5900 3981.09,6002 4981.09,6002 4111.09,6080 4581.09,6402 4025.09,6404 4625.09,6404 3759.04,6465.71 3803.33,6465.71 4912.15,6504.48 3759.72,6583.18 3807.7,6583.19 4581.09,6602 4781.09,6602 4425.09,6604 4625.09,6604 4825.09,6604 3781.09,6802 3981.09,6802 4181.09,6802 4381.09,6802 4581.09,6802 4981.09,6802 5181.09,6802 3825.09,6804 4225.09,6804 4425.09,6804 4625.09,6804 5025.09,6804 5225.09,6804
  other v2: 3756.77,5407 3761.91,5525.11 3787.4,5525.11 3816.74,5525.11
GRN1: U2.29 U9.53 | length 1101.7
  Top Layer w9.5: U2.29@4073.95,4873.68 4150.78,4873.68 v1(4225.09,4948) ; v1(4077.09,5716) 4077.09,5734.17 4084.22,5741.3 U9.53@4146.48,5741.3
  Bottom Layer w9.5: v1(4077.09,5716) 4077.09,5096 v1(4225.09,4948)
GRN2: U2.28 U9.52 | length 1090.3
  Top Layer w9.5: v1(4051.09,5716) 4051.09,5732 4076.09,5757 U9.52@4146.48,5757 ; U2.28@4073.95,4893.36 4138.46,4893.36 v1(4193.09,4948)
  Bottom Layer w9.5: v1(4051.09,5716) 4051.09,5090 v1(4193.09,4948)
GRN3: U2.27 U9.51 | length 1084.2
  Top Layer w9.5: v1(4025.09,5718) 4025.09,5732 4065.89,5772.8 U9.51@4146.48,5772.8 ; U2.27@4073.95,4913.05 4130.15,4913.05 4163.09,4946 v1(4163.09,4948)
  Bottom Layer w9.5: v1(4025.09,5718) 4025.09,5086 v1(4163.09,4948)
GRN4: U2.26 U9.50 | length 1078.3
  Top Layer w9.5: v1(3997.09,5718) 3997.09,5731.44 4054.16,5788.5 U9.50@4146.48,5788.5 ; U2.26@4073.95,4932.73 4117.83,4932.73 v1(4133.09,4948)
  Bottom Layer w9.5: v1(3997.09,5718) 3997.09,5084 v1(4133.09,4948)
K1: C55.2 R36.1 R37.2 U2.32 | length 3248.6
  Top Layer w9.5: U2.32@4073.95,4814.62 4077.57,4811.01 4136.1,4811.01 v1(4157.09,4832)
  Top Layer w10: C55.2@4354.09,6704.44 v1(4387.68,6704.44) 4505.18,6704.44 R36.1@4505.88,6705.14
  Bottom Layer w10: v1(4157.09,4832) 4157.09,4834 3963.09,5028 3963.09,5675.8 3882.89,5756 3693.09,5756 3657.09,5792 3657.09,6090.2 3710.89,6144 3762.89,6144 3815.09,6196.2 3815.09,6280 3785.09,6310 3736.89,6310 3685.09,6361.8 3685.09,6588.2 3717.17,6620.27 3796.04,6620.27 3859.21,6683.44 4366.68,6683.44 v1(4387.68,6704.44)
K2: C56.2 R38.1 R39.2 U2.33 | length 3615.9
  Top Layer w9.5: U2.33@4073.95,4794.94 4154.04,4794.94 4183.09,4824 v1(4183.09,4832)
  Top Layer w10: C56.2@4686.53,6709.44 v1(4723.25,6709.44) 4828.59,6709.44 R38.1@4829.3,6710.14
  Bottom Layer w10: v1(4183.09,4832) 4183.09,4842.98 4173.09,4852.98 4158.12,4852.98 3977.09,5034 3977.09,5681.6 3888.69,5770 3699.09,5770 3671.09,5798 3671.09,6084.4 3716.69,6130 3768.69,6130 3829.09,6190.4 3829.09,6285.8 3790.89,6324 3742.69,6324 3699.09,6367.6 3699.09,6582.4 3722.96,6606.27 3801.84,6606.27 3863.57,6668 4693.09,6668 4723.25,6698.16 v1(4723.25,6709.44)
OVCUR1: U9.45
OVCUR2B: U9.44
RESET: LCD1.11 U2.45 | length 880.2
  Top Layer w9.3: LCD1.11@3814.26,4257.91 3814.35,4258 4265.09,4258 4290.48,4283.39 U2.45@4290.48,4676.83
RESET-USB: R40.1 U2.18 U9.54 | length 1195.3
  Top Layer w9.5: R40.1@3954.16,5615.65 4070.74,5615.65 4103.09,5648 v1(4103.09,5716) 4112.59,5725.5 U9.54@4146.48,5725.5 ; U2.18@4251.11,5011.47 4251.11,4977.98 v1(4281.09,4948)
  Bottom Layer w9.5: v1(4103.09,5716) 4103.09,5126 v1(4281.09,4948)
RI0: U4.1
RI1: H1.2 U4.17 | length 2013.1
  Top Layer w9.5: U4.17@3918.84,4802.51 3918.84,4653.74 3893.09,4628 3717.09,4628 3701.09,4612 3701.09,3912.66 3743.76,3870 v1(4201.09,3870)
  Bottom Layer w9.3: H1.2@4199.09,3458.54 4201.09,3460.54 v1(4201.09,3870)
RST: R24.1 U4.9 | length 115.8
  Top Layer w10: R24.1@3700.64,4896 3709.64,4887 3804.73,4887 3804.89,4886.84 U4.9@3812.66,4886.84
RTS0: U4.19
RTS1: H1.12 U4.11 | length 2523
  Top Layer w9.5: U4.11@3814.58,4847.47 3650.56,4847.47 3619.09,4816 3619.09,3808 3705.09,3722 v1(4555.09,3722)
  Bottom Layer w9.3: v1(4555.09,3722) 4575.09,3722 4699.09,3598 H1.12@4699.09,3458.54
RXD1: R33.1 U4.12 | length 122
  Top Layer w10: R33.1@3704.77,4793.65 3748.58,4793.65 3782.71,4827.79 U4.12@3812.66,4827.79
SCL: LCD1.9 U2.42 | length 886.8
  Top Layer w9.3: LCD1.9@3814.26,4202.79 4214.3,4202.79 v1(4217.09,4200) ; v1(4221.09,4608) 4221.09,4624.66 4231.43,4634.99 U2.42@4231.43,4676.83
  Bottom Layer w9.3: v1(4217.09,4200) 4221.09,4204 v1(4221.09,4608)
SDA: LCD1.10 U2.43 | length 888.3
  Top Layer w9.3: LCD1.10@3814.26,4230.35 4248.74,4230.35 v1(4251.09,4228) ; v1(4249.09,4608) 4251.11,4610.02 U2.43@4251.11,4676.83
  Bottom Layer w9.3: v1(4249.09,4608) 4249.09,4230 v1(4251.09,4228)
SPICSN: U9.32 U10.1 | length 678.3
  Top Layer w8: v1(3803.09,6124) 3805.42,6121.67 U10.1@3805.42,6043 ; v1(4263.09,6106) 4287.09,6082 4287.09,6034.61 4272.38,6019.9 U9.32@4272.38,5993.2
  Bottom Layer w8: v1(3803.09,6124) 3813.09,6114 4255.09,6114 v1(4263.09,6106)
SPISCLK: U9.33 U10.6 | length 838.2
  Top Layer w6: U9.33@4256.68,5993.2 4256.68,6044.55 4258.13,6046 v1(4265.09,6046)
  Top Layer w8: U10.6@3705.42,5775.28 3705.42,5820.33 v1(3721.09,5836)
  Bottom Layer w8: v1(3721.09,5836) 3721.09,5972 3787.09,6038 4257.09,6038 v1(4265.09,6046)
SPISI: U9.34 U10.5 | length 858.4
  Top Layer w6: v1(4237.09,6058) 4240.98,6054.11 U9.34@4240.98,5993.2
  Top Layer w8: U10.5@3655.42,5775.28 3655.42,5804.33 v1(3693.09,5842)
  Bottom Layer w8: v1(3693.09,5842) 3693.09,5972 3779.09,6058 v1(4237.09,6058)
SPISO: U9.35 U10.2 | length 656.7
  Top Layer w6: U9.35@4225.18,5993.2 4225.18,6035.91 4211.09,6050 4211.09,6064 v1(4237.09,6090)
  Top Layer w8: v1(3755.09,6100) 3755.42,6099.67 U10.2@3755.42,6043
  Bottom Layer w8: v1(3755.09,6100) 4227.09,6100 v1(4237.09,6090)
SSRX0_N: D32.2 U9.25 USB3.5 | length 1334
  Top Layer w9.53: USB3.5@3787.4,6623.19 3847.9,6623.19 v1(3849.09,6622) 3849.09,6596 3855.33,6589.77 3879.91,6589.77 3892.14,6602 D32.2@3904.78,6602 ; U9.25@4382.68,5993.2 4382.68,6013.72 4382.55,6013.85 4382.55,6031.44 4439.09,6087.98 v1(4439.09,6104)
  Bottom Layer w9.53: v1(3849.09,6622) 3881.33,6589.77 4369.29,6589.77 4431.86,6527.2 4431.86,6128.01 4439.09,6120.77 v1(4439.09,6104)
SSRX0_P: D33.2 U9.26 USB3.6 | length 1334.1
  Top Layer w9.53: USB3.6@3787.4,6544.45 3846.64,6544.45 v1(3849.09,6542) 3849.09,6570.87 3852.46,6574.23 3879.91,6574.23 3892.14,6562 D33.2@3904.78,6562 ; U9.26@4366.88,5993.2 4366.88,6013.72 4367.02,6013.85 4367.02,6037.87 4412.12,6082.97 4412.12,6090.8
  Bottom Layer w9.53: v1(3849.09,6542) 3881.33,6574.23 4010.39,6574.23 cw(c4010.39,6565.13) 4019.49,6565.13 ccw(c4028.6,6565.13) 4028.6,6556.03 4040.39,6556.03 ccw(c4040.39,6565.13) 4049.49,6565.13 cw(c4058.6,6565.13) 4058.6,6574.23 4070.39,6574.23 cw(c4070.39,6565.13) 4079.49,6565.13 ccw(c4088.6,6565.13) 4088.6,6556.03 4100.39,6556.03 ccw(c4100.39,6565.13) 4109.49,6565.13 cw(c4118.6,6565.13) 4118.6,6574.23 4362.86,6574.23 4416.33,6520.77 4416.33,6128.01 4409.09,6120.77 v1(4409.09,6104)
SSRX1_N: D8.2 U5.5 U9.63 | length 2594.6
  Top Layer w9.5: v1(4229.09,5542) 4229.09,5560.09 4256.58,5587.58 4256.58,5626.2 4256.68,5626.3 U9.63@4256.68,5646.8
  Top Layer w10: D8.2@4840.81,3631.76 4855.19,3617.38 4872.47,3617.38 4889.09,3634 v1(4889.09,3647) 4889.09,3649.48 U5.5@4935.67,3649.48
  Bottom Layer w9.5: v1(4229.09,5542) 4229.09,5527.25 4223.84,5522 4223.84,5351.15 4521.95,5053.04 4521.95,4279.06 4661.01,4140 4773.01,4140 4814.59,4098.42 4814.59,4084.77 ccw(c4828.84,4084.77) 4828.84,4070.52 cw(c4828.84,4056.27) 4843.09,4056.27 4843.09,4054.77 cw(c4828.84,4054.77) 4828.84,4040.52 ccw(c4828.84,4026.27) 4814.59,4026.27 4814.59,3632 4828.59,3618 4873.53,3618 4889.09,3633.57 v1(4889.09,3647)
SSRX1_P: D9.2 U5.6 U9.62 | length 2595.3
  Top Layer w9.5: v1(4203.09,5542) 4201.63,5542 4200.59,5543.04 4200.59,5553.51 4241.08,5594 4241.08,5626.2 4240.98,5626.3 U9.62@4240.98,5646.8
  Top Layer w10: D9.2@4840.81,3587 4855.19,3601.38 4873.71,3601.38 4889.09,3586 v1(4889.09,3572) 4889.09,3570.74 U5.6@4935.67,3570.74
  Bottom Layer w9.5: v1(4203.09,5542) 4203.09,5527.25 4208.34,5522 4208.34,5344.73 4506.45,5046.62 4506.45,4272.64 4654.59,4124.5 4766.59,4124.5 4799.09,4092 4799.09,3625.58 4822.17,3602.5 4872.59,3602.5 4889.09,3586 v1(4889.09,3572)
SSRX2_N: D14.2 U6.5 U9.70 | length 1596.3
  Top Layer w9.3: D14.2@4835.81,4602 4853.16,4584.65 4881.74,4584.65 4889.09,4592 v1(4889.09,4617) 4933.19,4617 U6.5@4935.67,4619.48
  Top Layer w9.5: U9.70@4366.88,5646.8 4366.88,5561.65 4373.09,5555.44 v1(4373.09,5542)
  Bottom Layer w9.5: v1(4373.09,5542) 4373.09,5527.25 4367.84,5522 4367.84,5378 4586.34,5159.5 4685.51,5159.5 4729.95,5115.06 4729.95,4684.04 ccw(c4736.52,4684.04) 4736.52,4677.47 cw(c4736.52,4670.9) 4743.09,4670.9 4743.09,4654.04 cw(c4736.52,4654.04) 4736.52,4647.47 ccw(c4736.52,4640.9) 4729.95,4640.9 4729.95,4603.06 4749.01,4584 4869.53,4584 4889.09,4603.56 v1(4889.09,4617)
SSRX2_P: D15.2 U6.6 U9.69 | length 1597.9
  Top Layer w9.3: D15.2@4835.81,4552 4853.16,4569.35 4881.74,4569.35 4889.09,4562 v1(4889.09,4542) 4890.35,4540.74 U6.6@4935.67,4540.74
  Top Layer w9.5: v1(4347.09,5542) 4347.09,5555.44 4351.18,5559.52 U9.69@4351.18,5646.8
  Bottom Layer w9.5: v1(4347.09,5542) 4347.09,5527.25 4352.34,5522 4352.34,5371.58 4579.92,5144 4679.09,5144 4714.45,5108.64 4714.45,4596.64 4742.59,4568.5 4876.03,4568.5 4889.09,4555.44 v1(4889.09,4542)
SSRX3_N: D20.2 U7.5 U9.7 | length 713.3
  Top Layer w9.3: D20.2@4837.87,5568.48 4853.46,5552.89 4871.98,5552.89 4889.09,5570 v1(4889.09,5587) 4891.61,5584.48 U7.5@4935.67,5584.48
  Top Layer w9.5: U9.7@4492.88,5772.8 4513.38,5772.8 4513.53,5772.65 4530.43,5772.65 4552.33,5750.75 4575.09,5750.75 4580.34,5756 v1(4595.09,5756)
  Bottom Layer w9.5: v1(4595.09,5756) 4609.84,5756 4615.09,5750.75 4626.26,5750.75 4651.01,5726 4759.01,5726 4794.59,5690.42 4794.59,5570.42 4812.05,5552.96 4868.49,5552.96 4889.09,5573.56 v1(4889.09,5587)
SSRX3_P: D21.2 U7.6 U9.6 | length 706.3
  Top Layer w9.3: D21.2@4837.87,5522 4853.46,5537.59 4869.5,5537.59 4889.09,5518 v1(4889.09,5507) 4934.41,5507 U7.6@4935.67,5505.74
  Top Layer w9.5: U9.6@4492.88,5757 4513.38,5757 4513.53,5757.15 4524.01,5757.15 4545.91,5735.25 4575.09,5735.25 4580.34,5730 v1(4595.09,5730)
  Bottom Layer w9.5: v1(4595.09,5730) 4609.84,5730 4615.09,5735.25 4619.84,5735.25 4644.59,5710.5 4752.59,5710.5 4779.09,5684 4779.09,5564 4805.63,5537.46 4872.07,5537.46 4889.09,5520.44 v1(4889.09,5507)
SSRX4_N: D26.2 U8.5 U9.15 | length 1389.8
  Top Layer w9.3: D26.2@4835.81,6526.11 4850.06,6511.86 4873.96,6511.86 4889.09,6527 v1(4889.09,6547) 4933.15,6547 U8.5@4935.67,6544.48
  Top Layer w9.5: U9.15@4492.88,5898.7 4615.73,5898.7 4619.09,5902.06 v1(4619.09,5906)
  Bottom Layer w9.5: 4558.67,6513.5 4532.55,6487.38 4532.55,6226.54 4577.09,6182 4647.09,6182 4667.09,6162 4667.09,6000 4676.59,5990.5 4676.59,5908.25 4667.09,5898.75 4641.09,5898.75 4633.84,5906 v1(4619.09,5906) ; 4558.67,6514.75 4850.14,6514.75 ; 4850,6514.61 4850.14,6514.75 ; v1(4889.09,6547) 4856.84,6514.75 4850.14,6514.75
SSRX4_P: D27.2 U8.6 U9.14 | length 1383.1
  Top Layer w9.3: D27.2@4835.81,6482.31 4850.06,6496.56 4874.53,6496.56 4889.09,6482 v1(4889.09,6467) 4890.35,6465.74 U8.6@4935.67,6465.74
  Top Layer w9.5: U9.14@4492.88,5883 4513.38,5883 4513.48,5883.1 4615.73,5883.1 4619.09,5879.74 v1(4619.09,5876)
  Bottom Layer w9.5: v1(4619.09,5876) 4633.84,5876 4641.09,5883.25 4673.51,5883.25 4692.09,5901.83 4692.09,5996.92 4682.59,6006.42 4682.59,6168.42 4653.51,6197.5 4583.51,6197.5 4548.05,6232.96 4548.05,6480.96 4565.09,6498 4858.09,6498 v1(4889.09,6467)